# Altium PCB ESP32 WITH USB C PCB V111.PcbDoc (part 1 of 3)
Units mil, origin at the board's own origin, x right, y up, seen from the top; angles counter-clockwise.
Board outline 2735 x 1100 mil, 4 copper layers (L1, L2, L3, L4), stack 54.293 mil thick; 64 components, 73 nets, 299 pads, 176 vias.
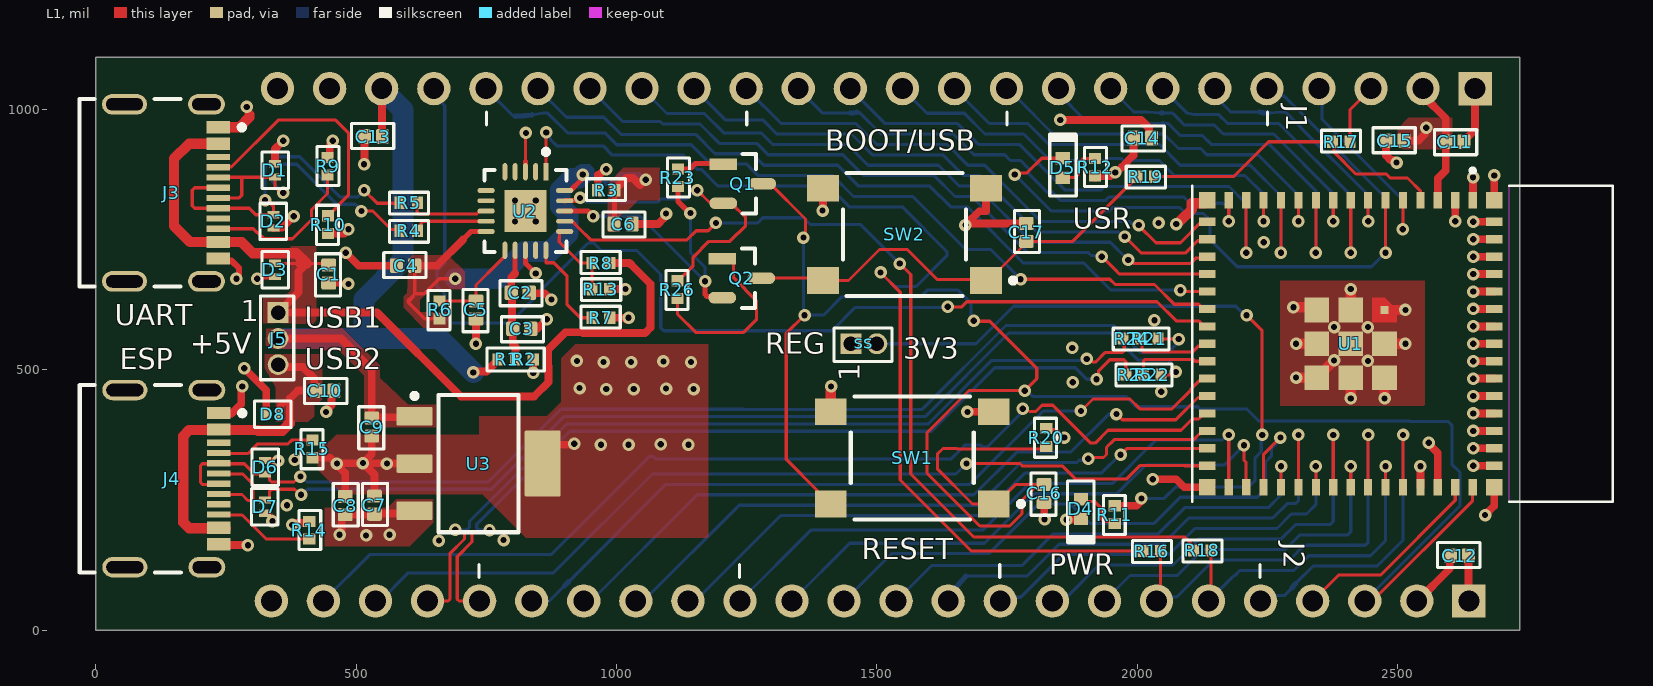
[diagram p0: L1 view]
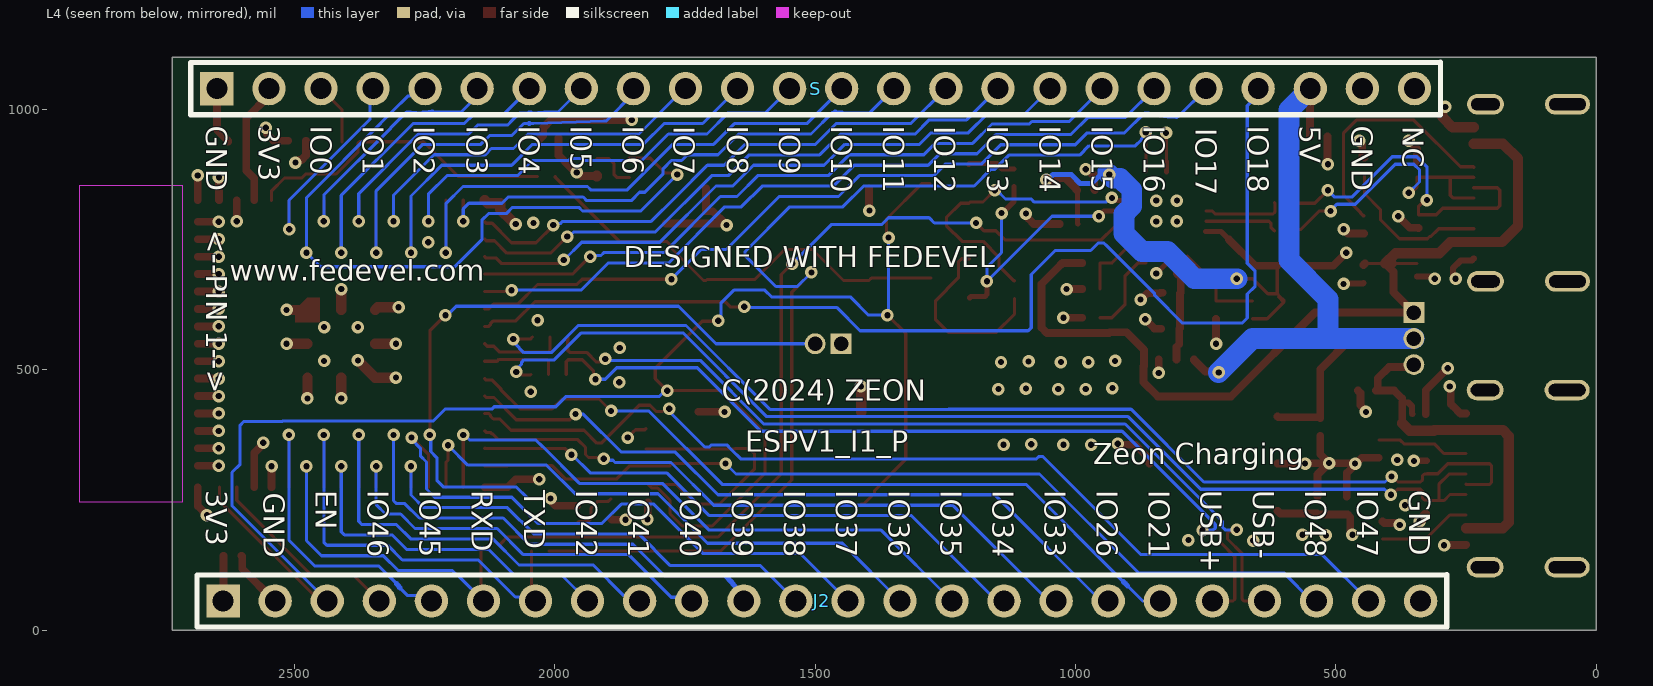
[diagram p1: L4 view, seen from below]
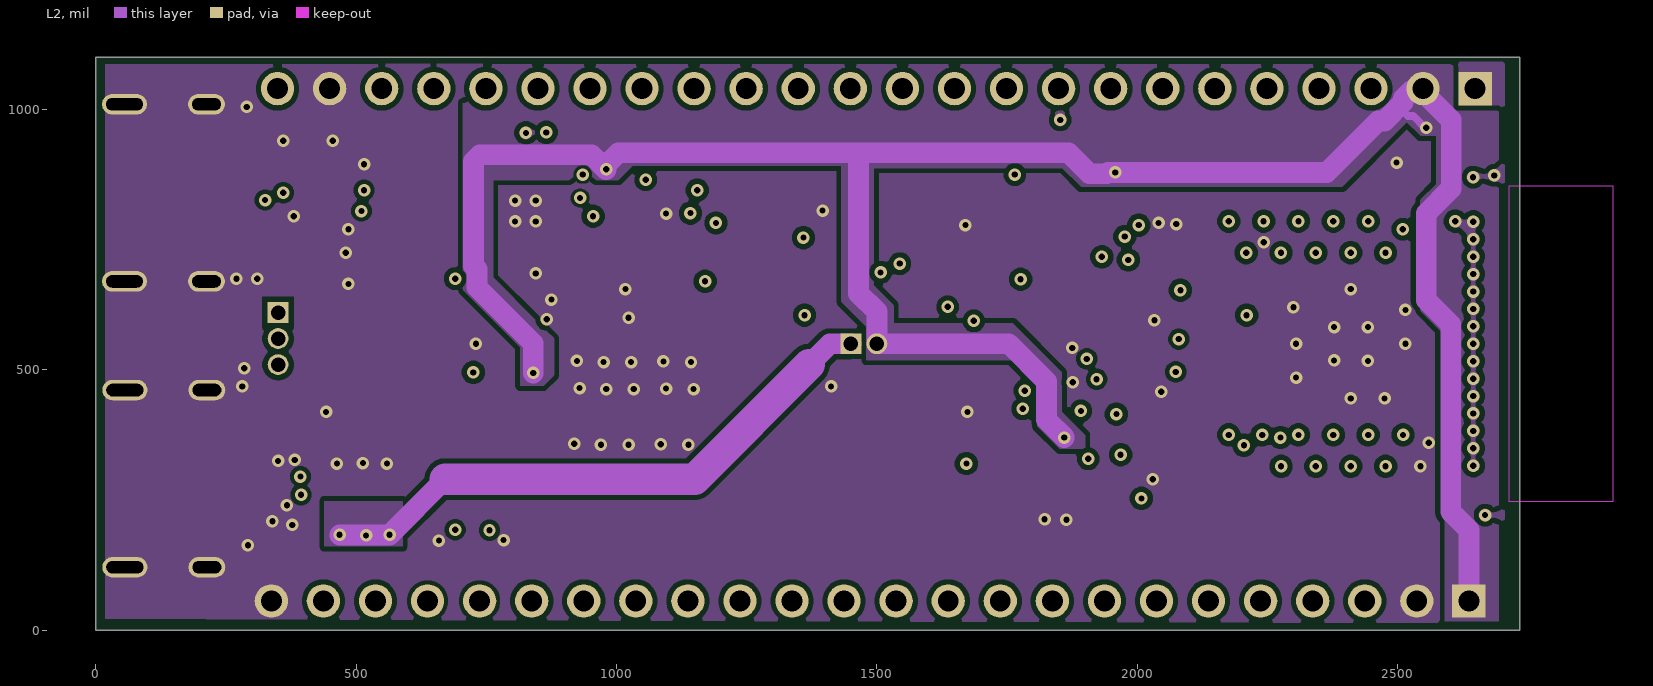
[diagram p2: L2]
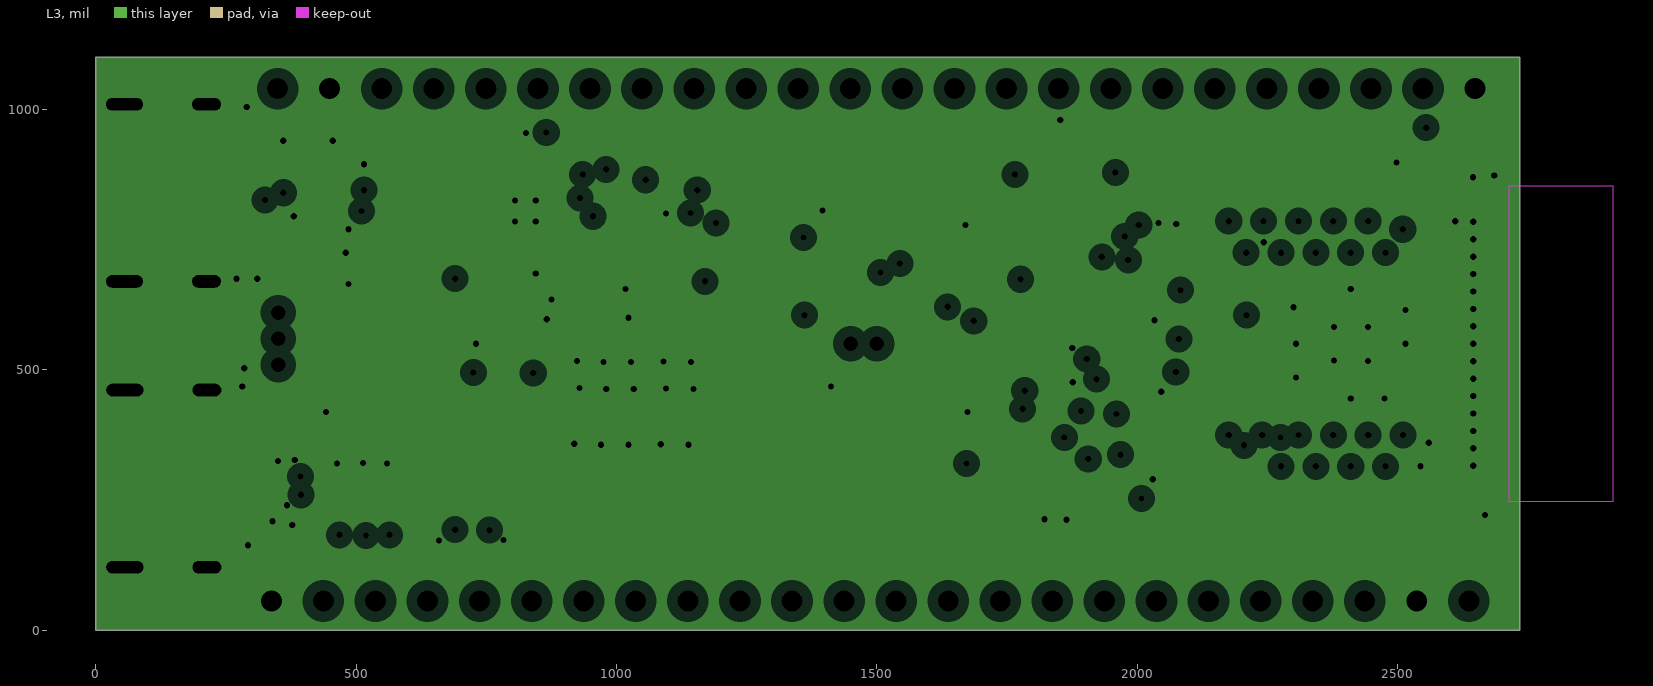
[diagram p3: L3, clearances drawn from the general rule]
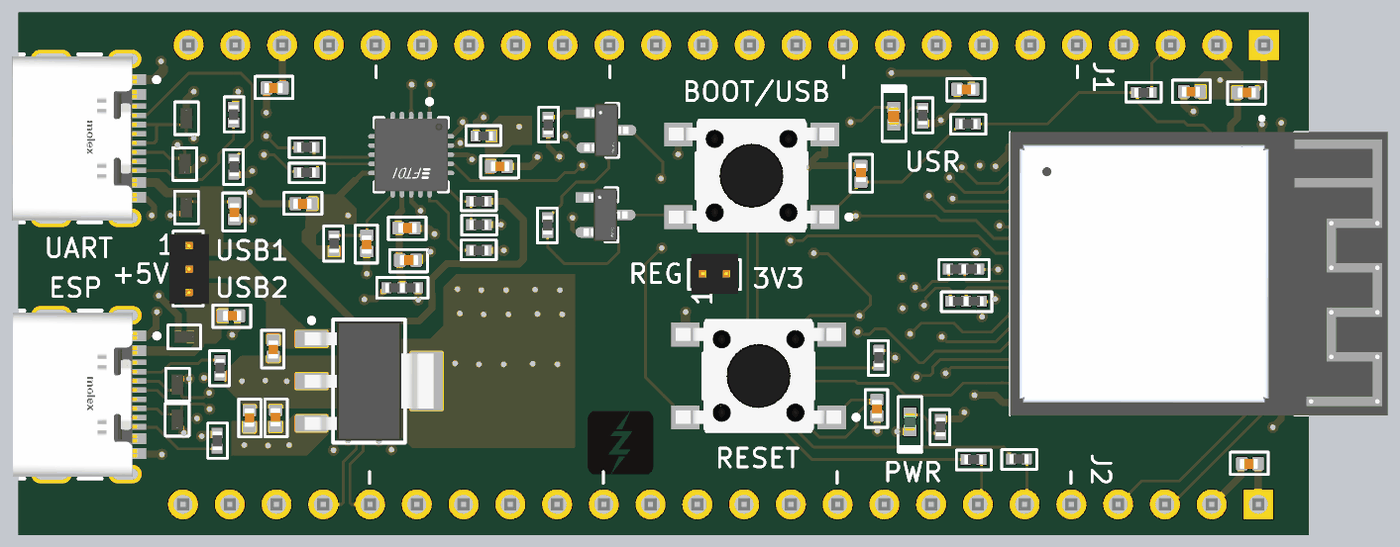
[diagram p5: 3D render of the assembled board from above, using the file's embedded part models]

## Layer stack, top to bottom
Top Solder: solder mask 0.4, Solder Resist, Dk 3.5
L1: signal copper 1.378
Dielectric 2: prepreg 0.391, PP-006, Dk 4.1
L2: signal copper 0.598
Dielectric 1: dielectric 49.803, FR-4, Dk 4.8
L3: plane copper 0.354, net GND
Dielectric 3: prepreg 0.391, PP-006, Dk 4.1
L4: signal copper 1.378
Bottom Solder: solder mask 0.4, Solder Resist, Dk 3.5

## Board outline
0,1100 0,0 2735,0 2735,1100

## Design rules (kind name [scope] priority, off if disabled: settings)
Clearance SMALLER [WithinRoom('FTDI')OR WithinRoom('USBC2') OR WithinRoom('USBC1')] p1: gap=6 ignorepadtopadclearanceinfootprint=FALSE
Clearance "DIFF90 Clearance" [InDifferentialPairClass('DIFF90')] p2: gap=8 ignorepadtopadclearanceinfootprint=FALSE
Clearance [All] p3: gap=10 ignorepadtopadclearanceinfootprint=FALSE except(6: SMDPad-SMDPad)
ComponentClearance R21R24 [InComponent('R21') vs InComponent('R24')] p1: gap=0 collisioncheckmode=3 verticalgap=0 showdistances=FALSE
ComponentClearance R22R25 [InComponent('R22') vs InComponent('R25')] p2: gap=0 collisioncheckmode=3 verticalgap=0 showdistances=FALSE
ComponentClearance R1R2 [InComponent('R1') vs InComponent('R2')] p3: gap=0 collisioncheckmode=3 verticalgap=0 showdistances=FALSE
ComponentClearance [All] p4: gap=10 collisioncheckmode=3 verticalgap=10 showdistances=FALSE
DiffPairsRouting DIFF90 [InDifferentialPairClass('DIFF90')] p1: maxlimit=8.1 minlimit=8 mostfreqgap=8 toplayer_minwidth=6.03 toplayer_maxwidth=6.23 toplayer_prefwidth=6.03 midlayer1_minwidth=5 midlayer1_maxwidth=5.2 midlayer1_prefwidth=5.1 bottomlayer_minwidth=6.03 bottomlayer_maxwidth=6.23 bottomlayer_prefwidth=6.03 maxuncoupledlength=500
HoleToHoleClearance [All] p1: gap=5 allowstackedmicrovias=TRUE
MinimumSolderMaskSliver [All] p1: minsoldermaskwidth=3.15
PlaneClearance [All] p1: clearance=20
PlaneConnect [All] p1: pad.planeconnectstyle=Relief pad.reliefexpansion=20 pad.reliefentries=4 pad.reliefconductorwidth=20 pad.reliefairgap=10 via.planeconnectstyle=Direct via.reliefexpansion=20 via.reliefentries=4 via.reliefconductorwidth=10 via.reliefairgap=10
PolygonConnect [All] p1: connectstyle=Direct reliefconductorwidth=10 reliefentries=4 polygonreliefangle="90 Angle" airgapwidth=10
RoomDefinition USBC2 [False vs False] p1: confinementstyle=ConfineIn formatcopy=TRUE lockcomponents=FALSE outline 165,430 290,430 290,140 165,140
RoomDefinition FTDI [False vs False] p2: confinementstyle=ConfineIn formatcopy=TRUE lockcomponents=FALSE outline 725,900 940,900 940,700 725,700
RoomDefinition USBC1 [False vs False] p3: confinementstyle=ConfineIn formatcopy=TRUE lockcomponents=FALSE outline 135,985 305,985 305,700 135,700
RoutingVias [All] p1: holewidth=12 width=24 viastyle="Through Hole" minholewidth=12 minwidth=24 maxholewidth=12 maxwidth=24
SilkToSilkClearance [All] p1: silktosilkclearance=6
SilkToSolderMaskClearance [IsPad] p1: minsilkscreentomaskgap=3.94 clearancetoexposedcopper=TRUE
SolderMaskExpansion [All] p1: expansion=2 istentingtop=FALSE
SupplyNets "Schematic Supply Nets_5" [InNet('GND')] p1: voltage=0.000
SupplyNets "Schematic Supply Nets_4" [InNet('+3V3_REG')] p2: voltage=0.000
SupplyNets "Schematic Supply Nets_3" [InNet('+5V_VBUS2')] p3: voltage=0.000
SupplyNets "Schematic Supply Nets_2" [InNet('+5V')] p4: voltage=0.000
SupplyNets "Schematic Supply Nets_1" [InNet('+3V3')] p5: voltage=0.000
SupplyNets "Schematic Supply Nets" [InNet('+5V_VBUS1')] p6: voltage=0.000
Width [All] p1: maxlimit=100 minlimit=6 preferedwidth=10 minimp=50.000000 maximp=50.000000 favimp=50.000000
22 further rules are at their usual default settings.

## Classes and differential pairs
differential pair class DIFF90: CON1_USB CON2_USB CON_ESP_USB ESP_USB FTDI_USB
differential pair FTDI_USB: +FTDI_USB_P -FTDI_USB_N
differential pair ESP_USB: +ESP_USB_P -ESP_USB_N
differential pair CON_ESP_USB: +CON_ESP_USB_P -CON_ESP_USB_N
differential pair CON2_USB: +CON2_USB_P -CON2_USB_N
differential pair CON1_USB: +CON1_USB_P -CON1_USB_N

## Components (designator, comment, footprint, x,y, rotation, side; value= is the part's Value field where it differs from the comment)
C1 "100nf, 50V" CAPC1005X70N 447,684 r90 top value=100nF
C2 "4.7uf, 16v" CAPC1005X70N 815,648 r180 top locked value=4.7uF
C3 "100nf, 50V" CAPC1005X70N 818,579 r180 top locked value=100nF
C4 "100nf, 50V" CAPC1005X70N 595,700 r0 top locked value=100nF
C5 "100nf, 50V" CAPC1005X70N 730,615 r90 top locked value=100nF
C6 "100nf, 50V" CAPC1005X70N 1012.68,780 r180 top locked value=100nF
C7 "10uf, 10V" CAPC1005X70N 535,240 r270 top locked value=10uF
C8 "10uf, 10V" CAPC1005X70N 479,239.32 r270 top locked value=10uF
C9 "4.7uf, 16v" CAPC1005X70N 530,390 r90 top locked value=4.7uF
C10 "100nf, 50V" CAPC1005X70N 440,460 r180 top locked value=100nF
C11 "10uf, 10V" CAPC1005X70N 2610,938 r180 top locked value=10uF
C12 "10uf, 10V" CAPC1005X70N 2619,143 r0 top locked value=10uF
C13 "100nf, 50V" CAPC1005X70N 533,948 r0 top locked value=100nF
C14 "10uf, 10V" CAPC1005X70N 2010,945 r180 top locked value=10uF
C15 "100nf, 50V" CAPC1005X70N 2495,940 r0 top locked value=100nF
C16 "1uf, 35V" CAPC1005X70N 1821,262.68 r90 top locked value=1uF
C17 "100nf, 50V" CAPC1005X70N 1787,764 r270 top locked value=100nF
D1 "AQ3045-01ETG" SOD882 344,883 r270 top
D2 "AQ3045-01ETG" SOD882 341,785 r90 top locked
D3 "AQ3045-01ETG" SOD882 344,692 r270 top
D4 "Green" LED0402G 1892,232.7 r90 top locked
D5 "RED" LED0402R 1857,906.4 r270 top locked
D6 "AQ3045-01ETG" SOD882 325,312.8 r270 top locked
D7 "AQ3045-01ETG" SOD882 325,237.2 r90 top locked
D8 "AQ3045-01ETG" SOD882 340,415 r180 top locked
J2 "0022284245" HDR_1x24_2.5MM 2637,56 r90 bottom locked
J3 "900-2171790001CT-ND" FP-2171790001-MFG 100.28,839.92 r270 top locked
J4 "900-2171790001CT-ND" FP-2171790001-MFG 101,291 r270 top locked
J5 "FTS-103-01-F-S" HDR_1x3_1.27MM 350,560 r0 top locked
Q1 "SS8050-G" FP-SS8050-G-IPC_B 1242.42,857.4 r0 top locked
Q2 "SS8050-G" FP-SS8050-G-IPC_B 1240.58,676 r0 top locked
R1 "0R" RESC1005X40N 789.21,520 r0 top value=0mR
R2 "0R" RESC1005X40N 823.07,520 r180 top value=0mR
R3 "0R" RESC1005X40N 980,845 r0 top locked value=0mR
R4 "27R" RESC1005X40N 601.07,767 r180 top
R5 "27R" RESC1005X40N 601.07,821 r180 top
R6 "0R" RESC1005X40N 660,615 r90 top locked value=0mR
R7 "10K" RESC1005X40N 970,600 r0 top locked value=10kR
R8 "4K7R" RESC1005X40N 970,705 r0 top locked value=4.7kR
R9 "5.1 K" RESC1005X40N 445,891 r270 top value=5.1kR
R10 "5.1 K" RESC1005X40N 446,779 r90 top value=5.1kR
R11 "1kR" RESC1005X40N 1957,221.93 r90 top locked
R12 "1kR" RESC1005X40N 1919,889 r270 top locked
R13 "10K" RESC1005X40N 970,655 r180 top locked value=10kR
R14 "5.1 K" RESC1005X40N 410,191.93 r270 top locked value=5.1kR
R15 "5.1 K" RESC1005X40N 416,348 r90 top value=5.1kR
R16 "0R" RESC1005X40N 2028,152 r180 top locked value=0mR
R17 "27R" RESC1005X40N 2392,938 r0 top locked
R18 "0R" RESC1005X40N 2125,153 r180 top locked value=0mR
R19 "27R" RESC1005X40N 2016,871 r180 top locked
R20 "10K" RESC1005X40N 1825,370 r90 top value=10kR
R21 "0R" RESC1005X40N 2023.07,560 r180 top value=0mR
R22 "0R" RESC1005X40N 2029.07,491 r180 top value=0mR
R23 "10K" RESC1005X40N 1118,869 r270 top locked value=10kR
R24 "0R" RESC1005X40N 1989.93,560 r0 top value=0mR
R25 "0R" RESC1005X40N 1994.93,491 r0 top value=0mR
R26 "10K" RESC1005X40N 1117,654.07 r90 top locked value=10kR
S "0022284245" HDR_1x24_2.5MM 2649,1040 r90 bottom locked (schematic designator J1)
ss "FTS-102-01-F-S" HDR_1x2_1.27MM 1475,550 r90 top locked (schematic designator J6)
SW1 "PTS645SH50SMTR92 LFS" FP-PTS645SH50SMTR92LFS-MFG 1568,331 r180 top locked
SW2 "PTS645SH50SMTR92 LFS" FP-PTS645SH50SMTR92LFS-MFG 1553,760 r180 top locked
U1 "ESP32-S3-MINI-1-N8" XCVR_ESP32-S3-MINI-1-N8 2410.04,550 r270 top locked
U2 "FT231XQ-R" FP-QFN-20-IPC_B 825,805 r270 top locked
U3 "TL1963A-33DCYR" DCY0004A_N 735,320 r0 top locked

## Footprints (in the part's own frame and the unit in brackets; to place one, negate y for a bottom-side part, rotate by r counter-clockwise, add the part's x,y. Pads: shape width x height; smd on the part's side, far side on the other; paste and mask are expansions set on the pad)
CAPC1005X70N [mm]
  rrect25% 0.64x0.72 smd: 1(-0.44,0) 2(0.44,0)
  silkscreen extent -1.07,-0.58 0.99,0.64, body extent -0.56,-0.27 0.44,0.28, height 0.48
DCY0004A_N [mm] "SOT223, 4-Leads, Body 6.7x3.7mm, Pitch 2.3mm, IPC Medium Density"
  rrect11% 1.75x0.9 smd: 1(-3.125,2.3) 2(-3.125,0) 3(-3.125,-2.3)
  rrect6% 1.75x3.2 smd: 4(3.125,0)
  silkscreen extent -3.25,-3.35 1.95,3.42, body extent -3.5,-3.25 3.5,3.25, height 1.62
FP-2171790001-MFG [mm]
  rect 0.6x1.15 smd paste+0 mask+0: A1B12(-3.2,3.425) A4B9(-2.4,3.425) B1A12(3.2,3.425) B4A9(2.4,3.425)
  rect 0.3x1.15 smd paste+0 mask+0: A5(-1.25,3.425) A6(-0.25,3.425) A7(0.25,3.425) A8(1.25,3.425) B5(1.75,3.425) B6(0.75,3.425) B7(-0.75,3.425) B8(-1.75,3.425)
  rrect100% 1x1.8 hole 1.4 slot 0.6 at 0 deg paste-2539.97 mask+0: S1(-4.32,2.85) S2(4.32,2.85)
  rrect100% 1x2.2 hole 1.8 slot 0.6 at 0 deg paste-2539.97 mask+0: S3(-4.32,-1.15) S4(4.32,-1.15)
  silkscreen extent -4.57,-3.35 4.57,4.7, body extent -4.92,-3.45 4.92,4.1, height 0.25
FP-PTS645SH50SMTR92LFS-MFG [mm]
  rect 1.55x1.3 smd paste+0 mask+0: 1(-3.975,2.25) 2(3.975,2.25) 3(-3.975,-2.25) 4(3.975,-2.25)
  silkscreen extent -5.43,-3 3,3, body extent -4.5,-3 4.5,3, height 5
FP-QFN-20-IPC_B [mm]
  rect 0.84x0.242 smd paste+0 mask+0: 1(-1.916,1)
  rrect100% 0.84x0.242 smd paste+0 mask+0: 2(-1.916,0.5) 3(-1.916,0) 4(-1.916,-0.5) 5(-1.916,-1) 11(1.916,-1) 12(1.916,-0.5) 13(1.916,0) 14(1.916,0.5) 15(1.916,1)
  rrect100% 0.242x0.84 smd paste+0 mask+0: 6(-1,-1.916) 7(-0.5,-1.916) 8(0,-1.916) 9(0.5,-1.916) 10(1,-1.916) 16(1,1.916) 17(0.5,1.916) 18(0,1.916) 19(-0.5,1.916) 20(-1,1.916)
  rect 2.05x2.05 smd paste-1000 mask+0: 21(0,0)
  silkscreen extent -3.01,-2 2,2, body extent -2.59,-2.59 2.59,2.59, height 0.25
FP-SS8050-G-IPC_B [mm]
  rect 1.357x0.572 smd paste+0 mask+0: 1(-0.951,0.95)
  rrect100% 1.357x0.572 smd paste+0 mask+0: 2(-0.951,-0.95) 3(0.951,0)
  silkscreen extent 0,-1.45 0.65,1.45, body extent -1.88,-1.7 1.88,1.7, height 0.25
HDR_1x2_1.27MM [mil]
  rect 40x40 hole 28: 1(0,25)
  round 40 hole 28: 2(0,-25)
  silkscreen extent -34,-54 30,57, body extent -42,-49 42,51, height 155
HDR_1x3_1.27MM [mil]
  rect 40x40 hole 28: 1(0,50)
  round 40 hole 28: 2(0,0) 3(0,-50)
  silkscreen extent -34,-79 30,82, body extent -42,-75 42,75, height 154
HDR_1x24_2.5MM [mil]
  rect 64x64 hole 40: 1(0,0)
  round 64 hole 40: 2(0,-100) 3(0,-200) 4(0,-300) 5(0,-400) 6(0,-500) 7(0,-600) 8(0,-700) 9(0,-800) 10(0,-900) 11(0,-1000) 12(0,-1100) 13(0,-1200) 14(0,-1300) 15(0,-1400) 16(0,-1500) 17(0,-1600) 18(0,-1700) 19(0,-1800) 20(0,-1900) 21(0,-2000) 22(0,-2100) 23(0,-2200) 24(0,-2300)
  silkscreen extent -50,-2350 51,50, body extent -49,-2350 49,50, height 385
LED0402G [mm]
  rect 0.6x0.7 smd: 1(-0.475,0) 2(0.475,0)
  silkscreen extent -1.68,-0.69 1.37,0.71, body extent -0.5,-0.3 0.5,0.3, height 0.21
LED0402R [mm]
  rect 0.6x0.7 smd: 1(0,0) 2(0.95,0)
  silkscreen extent -1.2,-0.69 1.85,0.71, body extent -0.02,-0.3 0.97,0.3, height 0.21
RESC1005X40N [mm]
  rect 0.54x0.6 smd: 1(-0.43,0) 2(0.43,0)
  silkscreen extent -0.97,-0.56 0.94,0.56, body extent -0.5,-0.25 0.5,0.25, height 0.4
SOD882 [mm]
  rect 0.35x0.6 smd: 1(-0.325,0) 2(0.325,0)
  silkscreen extent -0.89,-0.64 0.89,0.66, body extent -0.55,-0.33 0.55,0.33, height 0.57
XCVR_ESP32-S3-MINI-1-N8 [mm]
  rect 0.8x0.4 smd: 1(-7,5.95) 2(-7,5.1) 3(-7,4.25) 4(-7,3.4) 5(-7,2.55) 6(-7,1.7) 7(-7,0.85) 8(-7,0) 9(-7,-0.85) 10(-7,-1.7) 11(-7,-2.55) 12(-7,-3.4) 13(-7,-4.25) 14(-7,-5.1) 15(-7,-5.95) 31(7,-5.95) 32(7,-5.1) 33(7,-4.25) 34(7,-3.4) 35(7,-2.55) 36(7,-1.7) 37(7,-0.85) 38(7,0) 39(7,0.85) 40(7,1.7) 41(7,2.55) 42(7,3.4) 43(7,4.25) 44(7,5.1) 45(7,5.95)
  rect 0.4x0.8 smd: 16(-5.95,-7) 17(-5.1,-7) 18(-4.25,-7) 19(-3.4,-7) 20(-2.55,-7) 21(-1.7,-7) 22(-0.85,-7) 23(0,-7) 24(0.85,-7) 25(1.7,-7) 26(2.55,-7) 27(3.4,-7) 28(4.25,-7) 29(5.1,-7) 30(5.95,-7) 46(5.95,7) 47(5.1,7) 48(4.25,7) 49(3.4,7) 50(2.55,7) 51(1.7,7) 52(0.85,7) 53(0,7) 54(-0.85,7) 55(-1.7,7) 56(-2.55,7) 57(-3.4,7) 58(-4.25,7) 59(-5.1,7) 60(-5.95,7)
  rect 1.2x1.2 smd: 61(0,0) 67(0,1.65) 68(1.65,1.65) 69(-1.65,0) 70(1.65,0) 71(-1.65,-1.65) 72(0,-1.65) 73(1.65,-1.65)
  rect 0.8x0.8 smd: 62(-7,7) 63(-7,-7) 64(7,-7) 65(7,7)
  rect 0.4x0.4 smd paste-1 mask+0: 66(-1.65,1.65)
  L1 region: -1.05,1.05 -2.25,1.05 -2.25,1.65 -1.65,2.25 -1.05,2.25
  Keep-Out Layer region: 7.7,7.725 -7.7,7.725 -7.7,12.775 7.7,12.775
  Keep-Out Layer region: 7.7,7.725 -7.7,7.725 -7.7,12.775 7.7,12.775
  silkscreen extent -8.55,-7.73 7.7,12.78, body extent -7.7,-7.73 7.7,12.78, height 2.55

## Part data
C1 C3 C4 C5 C6 C10 C13 C15 C17: library part CL05B104KB54PNC, "CAP CER 0.1UF 50V X7R 0402", Case/Package=343Case, LCSC Part Number=C307331, Manufacturer=Samsung, Max Operating Temperature=125°C, Min Operating Temperature=-55°C, Supplier Part Number=1276-CL05B104KB54PNCCT-ND, Tolerance=10%, Voltage Rating=50V, Category="Ceramic Capacitors", ComponentLink1Description=https://datasheet.octopart.com/CL05B104KB54PNC-Samsung-datasheet-8326407.pdf?src-supplier=TME, ComponentLink1URL=https://datasheet.octopart.com/CL05B104KB54PNC-Samsung-datasheet-8326407.pdf?src-supplier=TME, Height=550um, Manufacturer Part Number=CL05B104KB54PNC, Material=4241ConductorMaterial, Pricing="1=0.1, 10=0.037, 100=0.0211, 1000=0.01333, 2500=0.01141, 5000=0.01026 (USD)", RoHS=Yes, RoHS Compliant=Yes, Stock=391082, Supplier=Digikey
C2 C9: library part CL05A475MO5NUNC, "4.7 µF ±20% 16V Ceramic Capacitor X5R 0402 (1005 Metric)", Case Code (Imperial)=0402, Case Code (Metric)=1005, LCSC Part Number=C318563, Manufacturer=Samsung, Max Operating Temperature=85°C, Min Operating Temperature=-55°C, Supplier Part Number=1276-6836-1-ND, Tolerance=20%, Voltage Rating=16V, Case/Package=0402, Category="Ceramic Capacitors", ComponentLink1Description=http://www.farnell.com/datasheets/2710653.pdf?src-supplier=Farnell, ComponentLink1URL=http://www.farnell.com/datasheets/2710653.pdf?src-supplier=Farnell, ComponentLink2Description=http://www.samsungsem.com/kr/support/product-search/mlcc/CL05A475MO5NUNC.jsp?src-supplier=Digikey, ComponentLink2URL=http://www.samsungsem.com/kr/support/product-search/mlcc/CL05A475MO5NUNC.jsp?src-supplier=Digikey, ComponentLink3Description=http://www.farnell.com/datasheets/2710653.pdf?src-supplier=Element14, ComponentLink3URL=http://www.farnell.com/datasheets/2710653.pdf?src-supplier=Element14, ComponentLink4Description=https://datasheet.octopart.com/CL05A475MO5NUNC-Samsung-Electro-Mechanics-datasheet-123102911.pdf?src-supplier=Future+Electronics, ComponentLink4URL=https://datasheet.octopart.com/CL05A475MO5NUNC-Samsung-Electro-Mechanics-datasheet-123102911.pdf?src-supplier=Future+Electronics, ComponentLink5Description=http://www.farnell.com/datasheets/2710653.pdf?src-supplier=Newark, ComponentLink5URL=http://www.farnell.com/datasheets/2710653.pdf?src-supplier=Newark, Height=550um, Length=0.039inch, Manufacturer Part Number=CL05A475MO5NUNC, Mounting Technology="Surface Mount", Packaging="Cut Tape", Pricing="1=0.19, 10=0.114, 100=0.0851 (USD)", RoHS=Yes, RoHS Compliant=Yes, Series=CL, Stock=57645, Supplier=Digikey, Thickness=0.022inch, Voltage Rating (DC)=16V, Width=0.02inch
C7 C8 C11 C12 C14: library part CL05A106MP8NUB8, "CAP CER 10UF 10V X5R 0402", Case Code (Imperial)=0402, Case Code (Metric)=1005, LCSC Part Number=C307415, Manufacturer=Samsung, Max Operating Temperature=85°C, Min Operating Temperature=-55°C, Supplier Part Number=1276-6830-1-ND, Tolerance=20%, Voltage Rating=10V, Case/Package=0402, Category="Ceramic Capacitors", ComponentLink1Description=http://www.samsungsem.com/kr/support/product-search/mlcc/CL05A106MP8NUB8.jsp?src-supplier=Digikey, ComponentLink1URL=http://www.samsungsem.com/kr/support/product-search/mlcc/CL05A106MP8NUB8.jsp?src-supplier=Digikey, ComponentLink2Description=https://datasheet.octopart.com/CL05A106MP8NUB8-Samsung-Electro-Mechanics-datasheet-136460857.pdf?src-supplier=Future+Electronics, ComponentLink2URL=https://datasheet.octopart.com/CL05A106MP8NUB8-Samsung-Electro-Mechanics-datasheet-136460857.pdf?src-supplier=Future+Electronics, Height=550um, Length=0.039inch, Manufacturer Part Number=CL05A106MP8NUB8, Material=4241ConductorMaterial, Mounting Technology="Surface Mount", Packaging="Cut Tape", Pricing="1=0.16, 10=0.096, 100=0.0685 (USD)", RoHS=Yes, RoHS Compliant=Yes, Series=CL, Stock=89467, Supplier=Digikey, Thickness=0.035inch, Width=0.02inch
C16: library part CL05A105KL5NRNC, "CAP CER 1UF 35V X5R 0402", Case Code (Imperial)=0402, Case Code (Metric)=1005, LCSC Part Number=C307413, Manufacturer=Samsung, Max Operating Temperature=85°C, Min Operating Temperature=-55°C, Supplier Part Number=1276-6796-1-ND, Tolerance=10%, Voltage Rating=35V, Case/Package=0402, Category="Ceramic Capacitors", ComponentLink1Description=http://www.samsungsem.com/kr/support/product-search/mlcc/CL05A105KL5NRNC.jsp?src-supplier=Digikey, ComponentLink1URL=http://www.samsungsem.com/kr/support/product-search/mlcc/CL05A105KL5NRNC.jsp?src-supplier=Digikey, ComponentLink2Description=https://datasheet.octopart.com/CL05A105KL5NRNC-Samsung-datasheet-8326407.pdf?src-supplier=TME, ComponentLink2URL=https://datasheet.octopart.com/CL05A105KL5NRNC-Samsung-datasheet-8326407.pdf?src-supplier=TME, Height=550um, Length=0.039inch, Manufacturer Part Number=CL05A105KL5NRNC, Material=4241ConductorMaterial, Mounting Technology="Surface Mount", Packaging="Cut Tape", Pricing="1=0.29, 10=0.17, 100=0.1097, 1000=0.07829, 2500=0.07048, 5000=0.06578 (USD)", RoHS=Yes, RoHS Compliant=Yes, Series=CL, Stock=104570, Supplier=Digikey, Thickness=0.022inch, Width=0.02inch
D1 D2 D3 D6 D7 D8: "TVS DIODE 5.3VWM 12VC SOD882", LCSC Part No=C3710326, Leakage Current=100nA, Manufacturer=Littelfuse, Max Operating Temperature=150°C, Min Breakdown Voltage=6.8V, Min Operating Temperature=-55°C, Operating Supply Voltage=5.3V, Peak Pulse Current=3A, Peak Pulse Power=40W, Power Line Protection=No, Supplier Part Number=F9321CT-ND, Category="TVS Diodes", ComponentLink1Description=https://www.littelfuse.com/~/media/electronics/datasheets/tvs_diode_arrays/littelfuse_tvs_diode_array_aq3045_datasheet.pdf.pdf?src-supplier=Digikey, ComponentLink1URL=https://www.littelfuse.com/~/media/electronics/datasheets/tvs_diode_arrays/littelfuse_tvs_diode_array_aq3045_datasheet.pdf.pdf?src-supplier=Digikey, ComponentLink2Description=http://www.littelfuse.com/~/media/electronics/datasheets/tvs_diode_arrays/littelfuse_tvs_diode_array_aq3045_datasheet.pdf.pdf?src-supplier=Digikey, ComponentLink2URL=http://www.littelfuse.com/~/media/electronics/datasheets/tvs_diode_arrays/littelfuse_tvs_diode_array_aq3045_datasheet.pdf.pdf?src-supplier=Digikey, Diode Type=ZENER, Manufacturer Part Number=AQ3045-01ETG, Mounting Technology="Surface Mount", Number of Bidirectional Channels=1, Number of Channels=1NUMBER, Packaging="Cut Tape", Pricing="1=0.45, 10=0.298, 100=0.146, 500=0.14, 1000=0.135, 10000=0.11, 50000=0.1064, 70000=0.10638 (USD)", Reverse Standoff Voltage=5.3V, RoHS=Yes, RoHS Compliant=Yes, Series="Automotive, AEC-Q101, AQ3045, SPA®", Stock=7470, Supplier=Digikey
D4: library part VLMG1500-GS08, "LED YLW-GRN 0402 SMD", Case Code (Imperial)=0402, Case Code (Metric)=1005, Color=Green,Yellow, Forward Current=30mA, Forward Voltage=2V, LCSC Part Number=C511404, Lens Color=Clear, Manufacturer=Vishay, Max Operating Temperature=85°C, Min Operating Temperature=-30°C, Package Quantity=1, Power Dissipation=75mW, Reverse Voltage=5V, Supplier Part Number=VLMG1500-GS08CT-ND, Test Current=20mA, Case/Package=0402, Category=LEDs, ComponentLink1Description=https://datasheet.ciiva.com/12071/vlmo1500-244705-12071911.pdf?src-supplier=Mouser, ComponentLink1URL=https://datasheet.ciiva.com/12071/vlmo1500-244705-12071911.pdf?src-supplier=Mouser, ComponentLink2Description=https://datasheet.ciiva.com/30005/vlmo1500-30005134.pdf?src-supplier=Avnet, ComponentLink2URL=https://datasheet.ciiva.com/30005/vlmo1500-30005134.pdf?src-supplier=Avnet, Depth=0.5mm, Dominant Wavelength=571nm, Height=0.35mm, Illumination Color=Green, Lead Free="Lead Free", Length=1mm, Lens Style=Rectangular, Luminous Intensity=35mcd, Manufacturer Part Number=VLMG1500-GS08, Mounting Technology="Surface Mount", Number of Elements=1, Number of LEDs=1, Packaging="Tape and Reel", Pins=2, Power Rating=75mW, Pricing="1=0.24, 10=0.164, 100=0.1147, 500=0.09218, 1000=0.0847 (USD)", Radiation Hardening=No, Reach SVHC Compliant=Unknown, RoHS=Yes, RoHS Compliant=Yes, Series=CHipLED, Stock=161149, Supplier=Digikey, Viewing Angle=130°, Wavelength=571nm, Width=0.5mm
D5: library part VLMS1500-GS08, "LED RED 0402 SMD", Case Code (Imperial)=0402, Case Code (Metric)=1005, Color=Red, Forward Current=30mA, Forward Voltage=2V, LCSC Part Number=C511370, Manufacturer=Vishay, Max Operating Temperature=85°C, Min Operating Temperature=-30°C, Package Quantity=9000, Power Rating=75mW, Supplier Part Number=VLMS1500-GS08CT-ND, Test Current=20mA, Case/Package=0402, Category=LEDs, ComponentLink1Description=http://components.arrow.com/part/dataview/56357384S461524N5680?src-supplier=Arrow+Electronics, ComponentLink1URL=http://components.arrow.com/part/dataview/56357384S461524N5680?src-supplier=Arrow+Electronics, ComponentLink2Description=http://www.mouser.com/ds/2/427/vlmo1500-244705.pdf?src-supplier=Mouser, ComponentLink2URL=http://www.mouser.com/ds/2/427/vlmo1500-244705.pdf?src-supplier=Mouser, ComponentLink3Description=http://www.farnell.com/datasheets/1809983.pdf?src-supplier=Farnell, ComponentLink3URL=http://www.farnell.com/datasheets/1809983.pdf?src-supplier=Farnell, ComponentLink4Description=http://www.alliedelec.com/m/d/cfc385e1097fc985ee9a50a3551ac188.pdf?src-supplier=Allied+Electronics, ComponentLink4URL=http://www.alliedelec.com/m/d/cfc385e1097fc985ee9a50a3551ac188.pdf?src-supplier=Allied+Electronics, ComponentLink5Description=https://datasheet.octopart.com/VLMS1500-GS08-Vishay-datasheet-62332426.pdf?src-supplier=Newark, ComponentLink5URL=https://datasheet.octopart.com/VLMS1500-GS08-Vishay-datasheet-62332426.pdf?src-supplier=Newark, ComponentLink6Description=http://www.vishay.com/docs/82554/vlmo1500.pdf?src-supplier=Avnet, ComponentLink6URL=http://www.vishay.com/docs/82554/vlmo1500.pdf?src-supplier=Avnet, ComponentLink7Description=https://datasheet.octopart.com/VLMS1500-GS08-Vishay-datasheet-21227148.pdf?src-supplier=Future+Electronics, ComponentLink7URL=https://datasheet.octopart.com/VLMS1500-GS08-Vishay-datasheet-21227148.pdf?src-supplier=Future+Electronics, ComponentLink8Description=http://www.farnell.com/datasheets/2050839.pdf?src-supplier=Newark, ComponentLink8URL=http://www.farnell.com/datasheets/2050839.pdf?src-supplier=Newark, ComponentLink9Description=http://www.farnell.com/datasheets/1809983.pdf?src-supplier=Element14, ComponentLink9URL=http://www.farnell.com/datasheets/1809983.pdf?src-supplier=Element14, ComponentLink10Description=https://datasheet.octopart.com/VLMS1500-GS08-Vishay-datasheet-33014519.pdf?src-supplier=Element14, ComponentLink10URL=https://datasheet.octopart.com/VLMS1500-GS08-Vishay-datasheet-33014519.pdf?src-supplier=Element14, ComponentLink11Description=http://www.farnell.com/datasheets/1809983.pdf?src-supplier=Newark, ComponentLink11URL=http://www.farnell.com/datasheets/1809983.pdf?src-supplier=Newark, ComponentLink12Description=http://datasheet.octopart.com/VLMS1500-GS08-Vishay-datasheet-21227148.pdf?src-supplier=Avnet, ComponentLink12URL=http://datasheet.octopart.com/VLMS1500-GS08-Vishay-datasheet-21227148.pdf?src-supplier=Avnet, ComponentLink13Description=http://datasheet.octopart.com/VLMS1500-GS08-Vishay-datasheet-21227148.pdf?src-supplier=LCSC, ComponentLink13URL=http://datasheet.octopart.com/VLMS1500-GS08-Vishay-datasheet-21227148.pdf?src-supplier=LCSC, ComponentLink14Description=http://datasheet.octopart.com/VLMS1500-GS08-Vishay-datasheet-21227148.pdf?src-supplier=Quest, ComponentLink14URL=http://datasheet.octopart.com/VLMS1500-GS08-Vishay-datasheet-21227148.pdf?src-supplier=Quest, ComponentLink15Description=http://datasheet.octopart.com/VLMS1500-GS08-Vishay-datasheet-21227148.pdf?src-supplier=NAC+Semi, ComponentLink15URL=http://datasheet.octopart.com/VLMS1500-GS08-Vishay-datasheet-21227148.pdf?src-supplier=NAC+Semi, Dominant Wavelength=631nm, Height=0.55mm, Illumination Color=Red, Lead Free="Lead Free", Length=1mm, Lens Size=0.5mm, Lens Style=Flat,Rectangular,Square, Luminous Intensity=54mcd, Manufacturer Part Number=VLMS1500-GS08, Mounting Technology="Surface Mount", Number of LEDs=1, Packaging="Tape and Reel", Pins=2, Pricing="1=0.24, 10=0.164, 100=0.1147, 500=0.09218, 1000=0.0847 (USD)", Radiation Hardening=No, Reach SVHC Compliant=Unknown, RoHS=Yes, RoHS Compliant=Yes, Series=CHipLED, Stock=17913, Supplier=Digikey, Viewing Angle=130°, Wavelength=631nm, Width=0.5mm
J2 S: "CONN HEADER VERT 24POS 2.54MM", Current Rating=4A, Housing Color=Black, LCSC Part Number=C7145888, Manufacturer=Molex, Manufacturer Part Number=22-28-4245, Supplier Part Number=900-0022284245-ND, Category="Headers and Wire Housings", ComponentLink1Description=https://datasheet.ciiva.com/6814/022284363-sd-6814049.pdf?src-supplier=Digikey, ComponentLink1URL=https://datasheet.ciiva.com/6814/022284363-sd-6814049.pdf?src-supplier=Digikey, ComponentLink2Description=https://datasheet.ciiva.com/10075/0022284245-pcb-headers-10075617.pdf?src-supplier=Avnet, ComponentLink2URL=https://datasheet.ciiva.com/10075/0022284245-pcb-headers-10075617.pdf?src-supplier=Avnet, ComponentLink3Description=https://datasheet.ciiva.com/1433/1597854-1433759.pdf?src-supplier=Element14, ComponentLink3URL=https://datasheet.ciiva.com/1433/1597854-1433759.pdf?src-supplier=Element14, Contact Material=Brass, Contact Plating=Gold, Gender=Male, Lead Free="Lead Free", Mounting Technology="Through Hole", Number of Circuits=24, Number of Contacts=24, Number of Positions=24, Number of Rows=1, Orientation=Vertical, Packaging=Bulk, Pitch=2.54mm, Plating=Tin, Pricing="1=1.21, 10=1.024, 100=0.8699, 500=0.77638, 1000=0.73932, 5000=0.65998, 10000=0.62851 (USD)", RoHS=No, Stock=1621, Supplier=Digikey, Termination=Solder
J3 J4: library part 2171790001, "CONN RCP USB2.0 TYP C 24P SMD RA", Current Rating=1.25A, LCSC Part Number=C3197684, Manufacturer=Molex, Manufacturer Part Number=217179-0001, Max Operating Temperature=85°C, Min Operating Temperature=-40°C, Voltage Rating=30V, Category=Connectors, Contact Material=Nickel,Gold, Gender=Receptacle, Height=3.36mm, Number of Contacts=16, Pricing="1=0.83, 10=0.704, 25=0.6596, 50=0.628, 100=0.598, 250=0.56052, 500=0.53374 (USD)", RoHS=No, Stock=25363, Supplier=Digikey, Supplier Part Number=900-2171790001CT-ND, USB Standard="USB 2.0"
J5: "CONN HEADER VERT 3POS 1.27MM", LCSC Part Number=C3333578, Manufacturer=Samtec, Supplier Part Number=612-FTS-103-01-F-S-ND, Category=Connectors, ComponentLink1Description=http://www.samtec.com/documents/webfiles/pdf/FTS.pdf?src-supplier=Avnet, ComponentLink1URL=http://www.samtec.com/documents/webfiles/pdf/FTS.pdf?src-supplier=Avnet, ComponentLink2Description=http://suddendocs.samtec.com/prints/fts-1xx-xx-xx-xx-xx-mkt.pdf?src-supplier=Digikey, ComponentLink2URL=http://suddendocs.samtec.com/prints/fts-1xx-xx-xx-xx-xx-mkt.pdf?src-supplier=Digikey, ComponentLink3Description=https://datasheet.octopart.com/FTS-103-01-F-S-Samtec-datasheet-116535195.pdf?src-supplier=Toby+Electronics, ComponentLink3URL=https://datasheet.octopart.com/FTS-103-01-F-S-Samtec-datasheet-116535195.pdf?src-supplier=Toby+Electronics, ComponentLink4Description=https://datasheet.octopart.com/FTS-103-01-F-S-Samtec-datasheet-151470456.pdf?src-supplier=Sager+Electronics, ComponentLink4URL=https://datasheet.octopart.com/FTS-103-01-F-S-Samtec-datasheet-151470456.pdf?src-supplier=Sager+Electronics, ComponentLink5Description=https://datasheet.octopart.com/FTS-103-01-F-S-Samtec-datasheet-118493358.pdf?src-supplier=Electro+Sonic, ComponentLink5URL=https://datasheet.octopart.com/FTS-103-01-F-S-Samtec-datasheet-118493358.pdf?src-supplier=Electro+Sonic, Gender=29Gender, Manufacturer Part Number=FTS-103-01-F-S, Pricing="1=0.73, 50=0.6378, 100=0.5407, 500=0.4491, 1000=0.38362, 2000=0.31431, 5000=0.2478, 10000=0.228 (USD)", RoHS=Yes, Stock=1338, Supplier=Digikey
Q1 Q2: "TRANS NPN 25V 1.5A SOT-23-3", Case/Package=TO-236-3, Collector Base Voltage (VCBO)=40V, Collector Emitter Breakdown Voltage=25V, Collector Emitter Saturation Voltage=500mV, Collector-emitter Voltage-Max=400mV, Emitter Base Voltage (VEBO)=5V, LCSC Part Number=C164886, Manufacturer=Comchip, Max Collector Current=1.5A, Max Operating Temperature=150°C, Max Power Dissipation=300mW, Supplier Part Number=641-1790-1-ND, Transition Frequency=100MHz, Category=Transistors, ComponentLink1Description="http://www.comchiptech.com/admin/files/product/SS8050-G RevA181526.pdf?src-supplier=Digikey", ComponentLink1URL="http://www.comchiptech.com/admin/files/product/SS8050-G RevA181526.pdf?src-supplier=Digikey", Height=1.15mm, hFE Min=200, Manufacturer Part Number=SS8050-G, Max Breakdown Voltage=25V, Mounting Technology="Surface Mount", Number of Elements=1, Packaging="Cut Tape", Power Dissipation=300mW, Pricing="1=0.24, 10=0.148, 100=0.0921, 500=0.06754, 1000=0.05958 (USD)", RoHS=Yes, RoHS Compliant=Yes, Series=-, Stock=98948, Supplier=Digikey
R1 R2 R3 R6 R16 R18 R21 R22 R24 R25: library part RC0402JR-070RL, "RES 0 OHM JUMPER 1/16W 0402", Case Code (Imperial)=0402, Case Code (Metric)=1005, LCSC Part Number=C60485, Manufacturer=Yageo, Max Operating Temperature=155°C, Max Power Dissipation=63mW, Min Operating Temperature=-55°C, Package Quantity=1, Power Rating=62.5mW, Resistance Tolerance=5%, Resistor Type="Thick Film", Supplier Part Number=311-0.0JRCT-ND, Temperature Coefficient=200ppm/°C, Voltage Rating=50V, Case/Package=0402, Category="Chip SMD Resistors", Construction=Rectangular, Contact Plating=Tin,Matte, Depth=0.5mm, Features="Moisture Resistant", Height=0.016inch, Lead Free=5697LeadFree, Length=1mm, Manufacturer Part Number=RC0402JR-070RL, Military Standard=Not, Number of Terminations=2, Packaging="Tape and Reel", Pricing="1=0.1, 10=0.01, 25=0.0064, 50=0.0054, 100=0.0047, 250=0.00392, 500=0.00346, 1000=0.00304, 5000=0.0023 (USD)", Reach SVHC Compliant=Unknown, RoHS=Yes, RoHS Compliant=Yes, Series=RC, Stock=197137, Supplier=Digikey, Technology="THICK FILM", Termination=SMD/SMT, Tolerance=5%, Width=0.02inch
R4 R5 R17 R19: library part RC0402FR-0727RL, "RES 27 OHM 1% 1/16W 0402", Case Code (Imperial)=0402, Case Code (Metric)=1005, LCSC Part Number=C138021, Manufacturer=Yageo, Max Operating Temperature=155°C, Max Power Dissipation=63mW, Min Operating Temperature=-55°C, Power Rating=62.5mW, Resistance Tolerance=1%, Resistor Type="Thick Film", Supplier Part Number=YAG3086CT-ND, Temperature Coefficient=100ppm/°C, Voltage Rating=50V, Case/Package=0402, Category="Chip SMD Resistors", ComponentLink1Description=https://datasheet.ciiva.com/11808/0900766b80c66297-11808450.pdf?src-supplier=Rs, ComponentLink1URL=https://datasheet.ciiva.com/11808/0900766b80c66297-11808450.pdf?src-supplier=Rs, ComponentLink2Description=https://datasheet.ciiva.com/17044/pyu-rc0402-51-rohs-l-6-17044345.pdf?src-supplier=Future+Electronics, ComponentLink2URL=https://datasheet.ciiva.com/17044/pyu-rc0402-51-rohs-l-6-17044345.pdf?src-supplier=Future+Electronics, ComponentLink3Description=https://datasheet.ciiva.com/7849/1018594-7849927.pdf?src-supplier=Element14, ComponentLink3URL=https://datasheet.ciiva.com/7849/1018594-7849927.pdf?src-supplier=Element14, ComponentLink4Description=https://datasheet.ciiva.com/7849/1018594-7849926.pdf?src-supplier=Element14, ComponentLink4URL=https://datasheet.ciiva.com/7849/1018594-7849926.pdf?src-supplier=Element14, ComponentLink5Description=https://datasheet.ciiva.com/15189/getdatasheetpartid-327852-15189402.pdf?src-supplier=Verical, ComponentLink5URL=https://datasheet.ciiva.com/15189/getdatasheetpartid-327852-15189402.pdf?src-supplier=Verical, Construction=Rectangular, Depth=0.5mm, Features="Moisture Resistant", Height=0.016inch, Lead Free="Lead Free", Length=1mm, Manufacturer Part Number=RC0402FR-0727RL, Military Standard=Not, Number of Terminations=2, Packaging="Tape and Reel", Pricing="1=0.1, 10=0.007, 100=0.0061, 1000=0.00408, 2500=0.00357 (USD)", Reach SVHC Compliant=Unknown, RoHS=Yes, RoHS Compliant=Yes, Series=RC, Stock=168813, Supplier=Digikey, Technology="THICK FILM", Termination=SMD/SMT, Tolerance=1%, Voltage Rating (AC)=50V, Weight=2.3E-05oz, Width=0.5mm
R7 R13 R20 R23 R26: library part AC0402FR-0710KL, "RES SMD 10K OHM 1% 1/16W 0402", Case Code (Imperial)=0402, Case Code (Metric)=1005, LCSC Part Number=C144807, Manufacturer=Yageo, Max Operating Temperature=155°C, Max Power Dissipation=63mW, Min Operating Temperature=-55°C, Power Rating=62.5mW, Supplier Part Number=YAG3436DKR-ND, Temperature Coefficient=100ppm/°C, Tolerance=1%, Voltage Rating=50V, Case/Package=0402, Category="Chip SMD Resistors", ComponentLink1Description=https://datasheet.ciiva.com/12656/pyu-ac-51-rohs-l-2-12656634.pdf?src-supplier=Mouser, ComponentLink1URL=https://datasheet.ciiva.com/12656/pyu-ac-51-rohs-l-2-12656634.pdf?src-supplier=Mouser, Features="Moisture Resistant,Automotive AEC-Q200", Height=0.015inch, Lead Free=5697LeadFree, Length=0.039inch, Manufacturer Part Number=AC0402FR-0710KL, Number of Terminations=2, Packaging="Tape and Reel", Pricing="1=0.1, 10=0.009, 100=0.0082, 1000=0.00612, 2500=0.0051 (USD)", RoHS=Yes, RoHS Compliant=Yes, Series=AC, Stock=787691, Supplier=Digikey, Termination=SMD/SMT, Width=0.02inch
R8: library part RC0402FR-074K7L, "RES 4.7K OHM 1% 1/16W 0402", Case Code (Imperial)=0402, Case Code (Metric)=1005, LCSC Part Number=C105871, Manufacturer=Yageo, Max Operating Temperature=155°C, Max Power Dissipation=63mW, Min Operating Temperature=-55°C, Power Rating=62.5mW, Resistance Tolerance=1%, Resistor Type="Thick Film", Supplier Part Number=311-4.7KLRCT-ND, Temperature Coefficient=100ppm/°C, Voltage Rating=50V, Case/Package=0402, Category="Chip SMD Resistors", ComponentLink1Description=https://datasheet.ciiva.com/22661/1686128-22661342.pdf?src-supplier=Element14, ComponentLink1URL=https://datasheet.ciiva.com/22661/1686128-22661342.pdf?src-supplier=Element14, ComponentLink2Description=https://datasheet.ciiva.com/7850/1018594-7850022.pdf?src-supplier=Element14, ComponentLink2URL=https://datasheet.ciiva.com/7850/1018594-7850022.pdf?src-supplier=Element14, ComponentLink3Description=https://datasheet.ciiva.com/7850/1018594-7850023.pdf?src-supplier=Element14, ComponentLink3URL=https://datasheet.ciiva.com/7850/1018594-7850023.pdf?src-supplier=Element14, Construction=Rectangular, Depth=0.5mm, Features="Moisture Resistant", Lead Free="Lead Free", Length=1mm, Manufacturer Part Number=RC0402FR-074K7L, Military Standard=Not, Number of Terminations=2, Packaging="Tape and Reel", Pins=2, Pricing="1=0.1, 10=0.02, 100=0.009, 1000=0.00474, 2500=0.00381, 5000=0.00328 (USD)", Reach SVHC Compliant=No, RoHS=Yes, RoHS Compliant=Yes, Series=RC, Stock=1623532, Supplier=Digikey, Termination=SMD/SMT, Tolerance=1%, Voltage Rating (AC)=50V, Voltage Rating (DC)=50V, Width=0.5mm
R9 R10 R14 R15: library part RC0402FR-075K1L, "RES 5.1K OHM 1% 1/16W 0402", Case Code (Imperial)=0402, Case Code (Metric)=1005, LCSC Part Number=C105872, Manufacturer=Yageo, Max Operating Temperature=155°C, Max Power Dissipation=63mW, Min Operating Temperature=-55°C, Package Quantity=1, Resistance Tolerance=1%, Resistor Type="Thick Film", Supplier Part Number=311-5.10KLRDKR-ND, Temperature Coefficient=100ppm/°C, Voltage Rating=50V, Case/Package=0402, Category="Chip SMD Resistors", ComponentLink1Description=https://datasheet.ciiva.com/7983/1018594-7983519.pdf?src-supplier=Element14, ComponentLink1URL=https://datasheet.ciiva.com/7983/1018594-7983519.pdf?src-supplier=Element14, ComponentLink2Description=https://datasheet.ciiva.com/46394/1018594-46394936.pdf?src-supplier=Element14, ComponentLink2URL=https://datasheet.ciiva.com/46394/1018594-46394936.pdf?src-supplier=Element14, ComponentLink3Description=https://datasheet.ciiva.com/2453/pyu-r-int-thick-7-2453401.pdf?src-supplier=Digikey, ComponentLink3URL=https://datasheet.ciiva.com/2453/pyu-r-int-thick-7-2453401.pdf?src-supplier=Digikey, ComponentLink4Description=https://datasheet.ciiva.com/2453/pyu-r-int-thick-7-2453402.pdf?src-supplier=Digikey, ComponentLink4URL=https://datasheet.ciiva.com/2453/pyu-r-int-thick-7-2453402.pdf?src-supplier=Digikey, ComponentLink5Description=https://datasheet.ciiva.com/2453/pyu-r-int-thick-7-2453400.pdf?src-supplier=Digikey, ComponentLink5URL=https://datasheet.ciiva.com/2453/pyu-r-int-thick-7-2453400.pdf?src-supplier=Digikey, ComponentLink6Description=https://datasheet.ciiva.com/12558/pyu-rc0402-51-rohs-l-6-r-8721-12558460.pdf?src-supplier=Mouser, ComponentLink6URL=https://datasheet.ciiva.com/12558/pyu-rc0402-51-rohs-l-6-r-8721-12558460.pdf?src-supplier=Mouser, ComponentLink7Description=https://datasheet.ciiva.com/16744/pyu-rc0402-51-rohs-l-6-r-16744283.pdf?src-supplier=Future+Electronics, ComponentLink7URL=https://datasheet.ciiva.com/16744/pyu-rc0402-51-rohs-l-6-r-16744283.pdf?src-supplier=Future+Electronics, ComponentLink8Description=https://datasheet.ciiva.com/15189/getdatasheetpartid-323636-15189493.pdf?src-supplier=Verical, ComponentLink8URL=https://datasheet.ciiva.com/15189/getdatasheetpartid-323636-15189493.pdf?src-supplier=Verical, Construction=Rectangular, Depth=0.5mm, Features="Moisture Resistant", Height=0.016inch, Lead Free=5697LeadFree, Length=1mm, Manufacturer Part Number=RC0402FR-075K1L, Military Standard=Not, Number of Terminations=2, Packaging="Tape and Reel", Power Rating=63mW, Pricing="1=0.1, 10=0.008, 100=0.0061, 1000=0.0051, 2500=0.00408 (USD)", Reach SVHC Compliant=Unknown, RoHS=Yes, RoHS Compliant=Yes, Series=RC, Stock=162272, Supplier=Digikey, Technology="THICK FILM", Termination=SMD/SMT, Tolerance=1%, Voltage Rating (DC)=50V, Width=0.02inch, Working Voltage=50V
R11 R12: library part RC0402FR-071KL, "RES 1K OHM 1% 1/16W 0402", Case Code (Imperial)=0402, Case Code (Metric)=1005, LCSC Part Number=C106235, Manufacturer=Yageo, Max Operating Temperature=155°C, Max Power Dissipation=63mW, Min Operating Temperature=-55°C, Power Rating=62.5mW, Resistance Tolerance=1%, Resistor Type="Thick Film", Supplier Part Number=311-1.00KLRCT-ND, Temperature Coefficient=100ppm/°C, Voltage Rating=50V, Case/Package=0402, Category="Chip SMD Resistors", ComponentLink1Description=https://datasheet.ciiva.com/11819/0900766b80c66297-11819477.pdf?src-supplier=Rs, ComponentLink1URL=https://datasheet.ciiva.com/11819/0900766b80c66297-11819477.pdf?src-supplier=Rs, ComponentLink2Description=https://datasheet.ciiva.com/7983/1018594-7983502.pdf?src-supplier=Element14, ComponentLink2URL=https://datasheet.ciiva.com/7983/1018594-7983502.pdf?src-supplier=Element14, ComponentLink3Description=https://datasheet.ciiva.com/22747/1018594-22747513.pdf?src-supplier=Element14, ComponentLink3URL=https://datasheet.ciiva.com/22747/1018594-22747513.pdf?src-supplier=Element14, ComponentLink4Description=https://datasheet.ciiva.com/12666/pyu-rc0402-51-rohs-l-6-r-12666741.pdf?src-supplier=Mouser, ComponentLink4URL=https://datasheet.ciiva.com/12666/pyu-rc0402-51-rohs-l-6-r-12666741.pdf?src-supplier=Mouser, ComponentLink5Description=https://datasheet.ciiva.com/7849/1018594-7849869.pdf?src-supplier=Element14, ComponentLink5URL=https://datasheet.ciiva.com/7849/1018594-7849869.pdf?src-supplier=Element14, ComponentLink6Description=https://datasheet.ciiva.com/7849/1018594-7849871.pdf?src-supplier=Element14, ComponentLink6URL=https://datasheet.ciiva.com/7849/1018594-7849871.pdf?src-supplier=Element14, ComponentLink7Description=https://datasheet.ciiva.com/17063/pyu-rc0402-51-rohs-l-6-r-17063193.pdf?src-supplier=Future+Electronics, ComponentLink7URL=https://datasheet.ciiva.com/17063/pyu-rc0402-51-rohs-l-6-r-17063193.pdf?src-supplier=Future+Electronics, Construction=Rectangular, Depth=0.5mm, Features="Moisture Resistant", Height=0.32mm, Lead Free=5697LeadFree, Length=1mm, Manufacturer Part Number=RC0402FR-071KL, Military Standard=Not, Number of Terminations=2, Packaging="Tape and Reel", Pins=2, Pricing="1=0.1, 10=0.007, 100=0.0061, 1000=0.0051, 2500=0.00408 (USD)", Reach SVHC Compliant=No, RoHS=Yes, RoHS Compliant=Yes, Series=RC, Stock=3280122, Supplier=Digikey, Technology="THICK FILM", Termination=SMD/SMT, Tolerance=1%, Voltage Rating (AC)=50V, Voltage Rating (DC)=50V, Width=0.5mm
ss: "CONN HEADER VERT 2POS 1.27MM", Flammability Rating="UL94 V-0", Insulation Color=Black, LCSC Part Number=C6045317, Manufacturer=Samtec, Max Operating Temperature=125°C, Min Operating Temperature=-55°C, Supplier Part Number=SAM15176-ND, Category=Connectors, ComponentLink1Description=http://www.samtec.com/documents/webfiles/pdf/FTS.pdf?src-supplier=Avnet, ComponentLink1URL=http://www.samtec.com/documents/webfiles/pdf/FTS.pdf?src-supplier=Avnet, ComponentLink2Description=https://datasheet.octopart.com/FTS-102-01-F-S-Samtec-datasheet-118493358.pdf?src-supplier=Electro+Sonic, ComponentLink2URL=https://datasheet.octopart.com/FTS-102-01-F-S-Samtec-datasheet-118493358.pdf?src-supplier=Electro+Sonic, Contact Finish - Mating=GOLD, Contact Material=Bronze, Contact Plating=Gold, Contact Shape=Square, Contact Type="Male Pin", Fastening Type=Pull, Gender=Male, Insulation Material=Polymer, Manufacturer Part Number=FTS-102-01-F-S, Mounting Technology="Through Hole", Number of Contacts=2, Number of Positions=2, Number of Rows=1, Packaging=Bulk, Pitch=1.27mm, Pricing="1=0.49, 50=0.4252, 100=0.3608, 500=0.2994, 1000=0.25609, 2000=0.252 (USD)", Radiation Hardening=No, RoHS=Yes, RoHS Compliant=Yes, Series=FTS, Stock=135, Supplier=Digikey, Termination=Solder
SW1 SW2: library part PTS645SH50SMTR92LFS, "SWITCH TACTILE SPST-NO 0.05A 12V", Contact Current Rating=50mA, Contact Resistance=100mR, LCSC Part Number=C221869, Manufacturer="ITT C&K", Supplier Part Number=CKN9085CT-ND, Category="Tactile Switches", ComponentLink1Description=https://datasheet.ciiva.com/29903/getdatasheetpartid-773702-29903807.pdf?src-supplier=Verical, ComponentLink1URL=https://datasheet.ciiva.com/29903/getdatasheetpartid-773702-29903807.pdf?src-supplier=Verical, ComponentLink2Description=https://datasheet.ciiva.com/14920/pts645-14920741.pdf?src-supplier=Digikey, ComponentLink2URL=https://datasheet.ciiva.com/14920/pts645-14920741.pdf?src-supplier=Digikey, ComponentLink3Description=https://datasheet.ciiva.com/22637/1707731-22637356.pdf?src-supplier=Element14, ComponentLink3URL=https://datasheet.ciiva.com/22637/1707731-22637356.pdf?src-supplier=Element14, Lead Free=5697LeadFree, Manufacturer Part Number=PTS645SH50SMTR92LFS, Number of Positions=2NUMBER, Pricing="1=0.35, 10=0.3, 25=0.2804, 100=0.251, 250=0.23256, 500=0.21948 (USD)", RoHS=Yes, Stock=18845, Supplier=Digikey
U1: "SMD module, ESP32-S3FN8, 8 MB SPI flash, PCB antenna", LCSC Part Number=C2913206, Manufacturer="Espressif Systems", Supplier Part Number=356-ESP32-S3-MINI1N8, Category=LDO, ComponentLink1Description=https://datasheet.octopart.com/ESP32-S3-MINI-1-N8-Espressif-Systems-datasheet-165560562.pdf?src-supplier=TME, ComponentLink1URL=https://datasheet.octopart.com/ESP32-S3-MINI-1-N8-Espressif-Systems-datasheet-165560562.pdf?src-supplier=TME, Manufacturer Part Number=ESP32-S3-MINI-1-N8, Pricing="1=3.1, 10=3.1, 50=3.1, 100=3.1, 1000=3.1, 10000=3.1 (USD)", RoHS=No, Stock=3144, Supplier=Mouser
U2: "IC USB SERIAL FULL UART 20QFN", LCSC Part Number=C132159, Manufacturer=FTDI, Supplier Part Number=768-1128-1-ND, Category="Interface ICs", ComponentLink1Description=https://datasheet.ciiva.com/4787/ds-ft231x-13571-4787570.pdf?src-supplier=Mouser, ComponentLink1URL=https://datasheet.ciiva.com/4787/ds-ft231x-13571-4787570.pdf?src-supplier=Mouser, ComponentLink2Description=https://datasheet.ciiva.com/30475/0900766b811020d3-30475405.pdf?src-supplier=Rs, ComponentLink2URL=https://datasheet.ciiva.com/30475/0900766b811020d3-30475405.pdf?src-supplier=Rs, ComponentLink3Description=https://datasheet.ciiva.com/1787/ds-ft231x-1787312.pdf?src-supplier=Digikey, ComponentLink3URL=https://datasheet.ciiva.com/1787/ds-ft231x-1787312.pdf?src-supplier=Digikey, ComponentLink4Description=https://datasheet.ciiva.com/1787/ft-x-series-1787313.pdf?src-supplier=Digikey, ComponentLink4URL=https://datasheet.ciiva.com/1787/ft-x-series-1787313.pdf?src-supplier=Digikey, ComponentLink5Description=https://datasheet.ciiva.com/1787/ft-x-series-1787314.pdf?src-supplier=Digikey, ComponentLink5URL=https://datasheet.ciiva.com/1787/ft-x-series-1787314.pdf?src-supplier=Digikey, Height=800um, Lead Free=5697LeadFree, Manufacturer Part Number=FT231XQ-R, Pricing="1=2.34, 25=2.27, 100=2.2, 250=2, 500=1.82002, 1000=1.7625 (USD)", RoHS=Yes, Stock=27211, Supplier=Digikey
U3: "IC REG LIN 3.3V 1.5A SOT-223-4", LCSC Part Number=C181262, Manufacturer="Texas Instruments", Supplier Part Number=296-24897-1-ND, Category="Voltage Regulators - Linear", ComponentLink1Description=https://datasheet.ciiva.com/2046/-2046068.pdf?src-supplier=Digikey, ComponentLink1URL=https://datasheet.ciiva.com/2046/-2046068.pdf?src-supplier=Digikey, Lead Free=5697LeadFree, Manufacturer Part Number=TL1963A-33DCYR, Pricing="1=2.76, 10=2.062, 25=1.8864, 100=1.6934, 250=1.60148, 500=1.54604, 1000=1.50041 (USD)", RoHS=Yes, Stock=2566, Supplier=Digikey, Thickness=1.6mm

## Via types
v1: diameter 24, hole 12, L1 to L4, tented both sides, 176 vias

## Nets (pads, with @x,y where several pads share a name; then routed paths per layer and width w, separated by ;. In a path a pad name is that pad's centre, name@x,y a point inside that pad or via, vN(x,y) a via of type N, cw(c..) or ccw(c..) an arc to the next point about the centre after c; other vN are vias at no path point)
+3V3: C11.2 C12.2 C14.2 C15.2 J2.1 R2.1 R3.1 R11.2 R12.2 R20.2 S.2 ss.2 U1.3 | length 6351.4
  L1 w6: R20.2@1825,386.93 1826.93,385 1845,385 1850,380 ; v1@2215,600 2240,575 v1(2240,375)
  L1 w15: v1@840,490 R2.1@840,520 ; R3.1@963.07,845 964.04,845.96 964.04,874.04 966.6,874.04 977.56,885 v1(980,885) ; R12.2@1919,872.07 v1@1948.64,872.07 ; R11.2@1957,238.86 1999.21,238.86 2008,247.65 v1(2008,253) ; v1(1958,879) 1959.88,879 1970.94,890.06 1992.68,911.8 C14.2@1992.68,945 ; C15.2@2512.32,940 2540,940 v1@2553.28,953.28 ; S.2@2549,1040 2549,1026.74 2592.68,983.06 C11.2@2592.68,938 2592.68,882.68 2577.36,867.36 U1.3@2577.36,825.59 ; C12.2@2636.32,143 2636.32,56.68 J2.1@2637,56
  L1 w20: R12.2@1919,872.07 R12.2@1919.63,872.7
  L2 w15: 2511,1014.32 2511,996.44 2519.79,987.65 2529.92,987.65 2552.56,965 v1(2555,965)
  L2 w40: v1(840,494) 840,550.6 732,658.6 732,693 725,700 725,900 738,913 952,913 v1(980,885) 980,893.57 1003.43,917 1470,917 ; 1465,912 1470,917 ; 1465,914 1465,646.7 1500,611.7 ; 1500,609.7 ss.2@1500,550 1753.4,550 1826,477.4 1826,404 v1(1860,370) ; S.2@2544.41,1035.41 2525.41,1035.41 2511,1021 2511,1014.32 2474.68,978 2463,978 2364,879 v1(1958,879) 1944,879 1941.57,876.57 1908.43,876.57 1868,917 1470,917 ; S.2@2549,1040 2549,1033.51 2603,979.51 2603,848 2555,800 2555,634.4 2602,587.4 2602,227.6 2637,192.6 J2.1@2637,56
  L4 w6: ss.2@1500,550 1690.28,550 1762.28,622 2189.21,622 2206.21,605 v1(2210,605) ; v1(2008,253) 2052.15,253 2074.43,275.28 2214.14,275.28 2226.45,287.59 2226.45,331.3 2238.18,343.03 2238.18,373.18 v1(2240,375)
+3V3_FTDI: C4.2 C6.2 R3.2 R6.1 U2.10 U2.20 | length 1183.2
  L1 w6: 610,640 600,630 ; C4.2@612.32,700 612.32,646.11 ; R6.1@660,598.07 631.93,598.07 600,630 ; v1(690,675) 659.42,675 630.53,646.11 612.32,646.11 ; 600,630 600,633.79 608.11,641.89 612.32,646.11
  L1 w10.01: 705,750 720.63,765.63 U2.10@749.59,765.63 ; U2.20@900.41,844.37 911.71,844.37 932.32,864.99 932.32,872.32 v1(935,875) ; C6.2@995.35,780 996.14,780.79 996.14,844.21 R3.2@996.93,845
  L1 w15: C4.2@612.32,700 655,700 705,750 ; R3.2@996.93,845 1000.06,848.13 1000.06,849.31 1019.16,868.41 1031.59,868.41 1045,855 1055,865 v1(1056,865)
  L4 w10.01: v1(935,875) 935.69,874.31 940,874.31 952.5,874.31 968.81,858 991.19,858 1008.19,875 1043.14,875 1053.14,865 v1(1056,865) ; v1@940,880 947.13,880 ; 940,890.02 947.13,890.02 953,884.15 953,873.81
  L4 w40: v1(690,675) 771.26,675 796.26,700 823.26,727 872,727 907,762 907,799.26 892,814.26 892,845.74 914.26,868 928,868 v1(935,875)
+3V3_REG: C7.2 C8.2 ss.1 U3.3 | length 1315.1
  L1 w15: v1(468,183) 468,185.44 472.33,189.76 472.33,216.9 477.43,222 C8.2@479,222 479.34,222.34 534.66,222.34 C7.2@535,222.68 C7.2@536.57,222.68 ; C7.2@536.32,224 606.52,224 U3.3@611.97,229.45
  L2 w15: v1(468,183) v1@468.5,182.5 ; v1@518.5,182.5 v1(519,182) v1@519.5,182.5 ; v1@563.5,182.5 v1(564,183)
  L2 w40: v1@468.5,182.5 v1@518.5,182.5 ; v1@519.5,182.5 v1@563.5,182.5 ; v1(564,183) 671,290 ; 1370,510 1410,550 ss.1@1450,550
  L2 w60: 671,290 1150,290 1370,510
+5V: C9.2 C13.2 J5.2 R1.1 S.22 U3.1 | length 1462.1
  L1 w6: S.22@549,1040 S.22@549.66,1039.34 ; C13.2@549.66,948.66 C13.2@550.32,948
  L1 w15: J5.2@350,560 470.72,560 530,500.72 C9.2@530,407.32 531.61,408.94 610.35,408.94 U3.1@611.97,410.55 ; C13.2@549.66,948.66 S.22@549.66,1039.34 ; v1(725,495) 726.72,496.72 750.19,496.72 772.28,518.82 R1.1@772.28,520
  L4 w40: J5.2@350,560 515,560 ; S.22@549,1040 590,999 590,710.6 515,635.6 515,560 ; v1(725,495) 660,560 515,560